# Altium PCB PCB Layout.PcbDoc (part 2 of 3)
Units mm, origin at the board's own origin, x right, y up, seen from the top; angles counter-clockwise.
Board outline 100.03 x 55.01 mm, 4 copper layers (Top Layer, Signal Layer 2, Signal Layer 1, Bottom Layer), stack 0.779 mm thick; 236 components, 218 nets, 813 pads, 395 vias.
Unrouted connection lines stored in the file: 15.
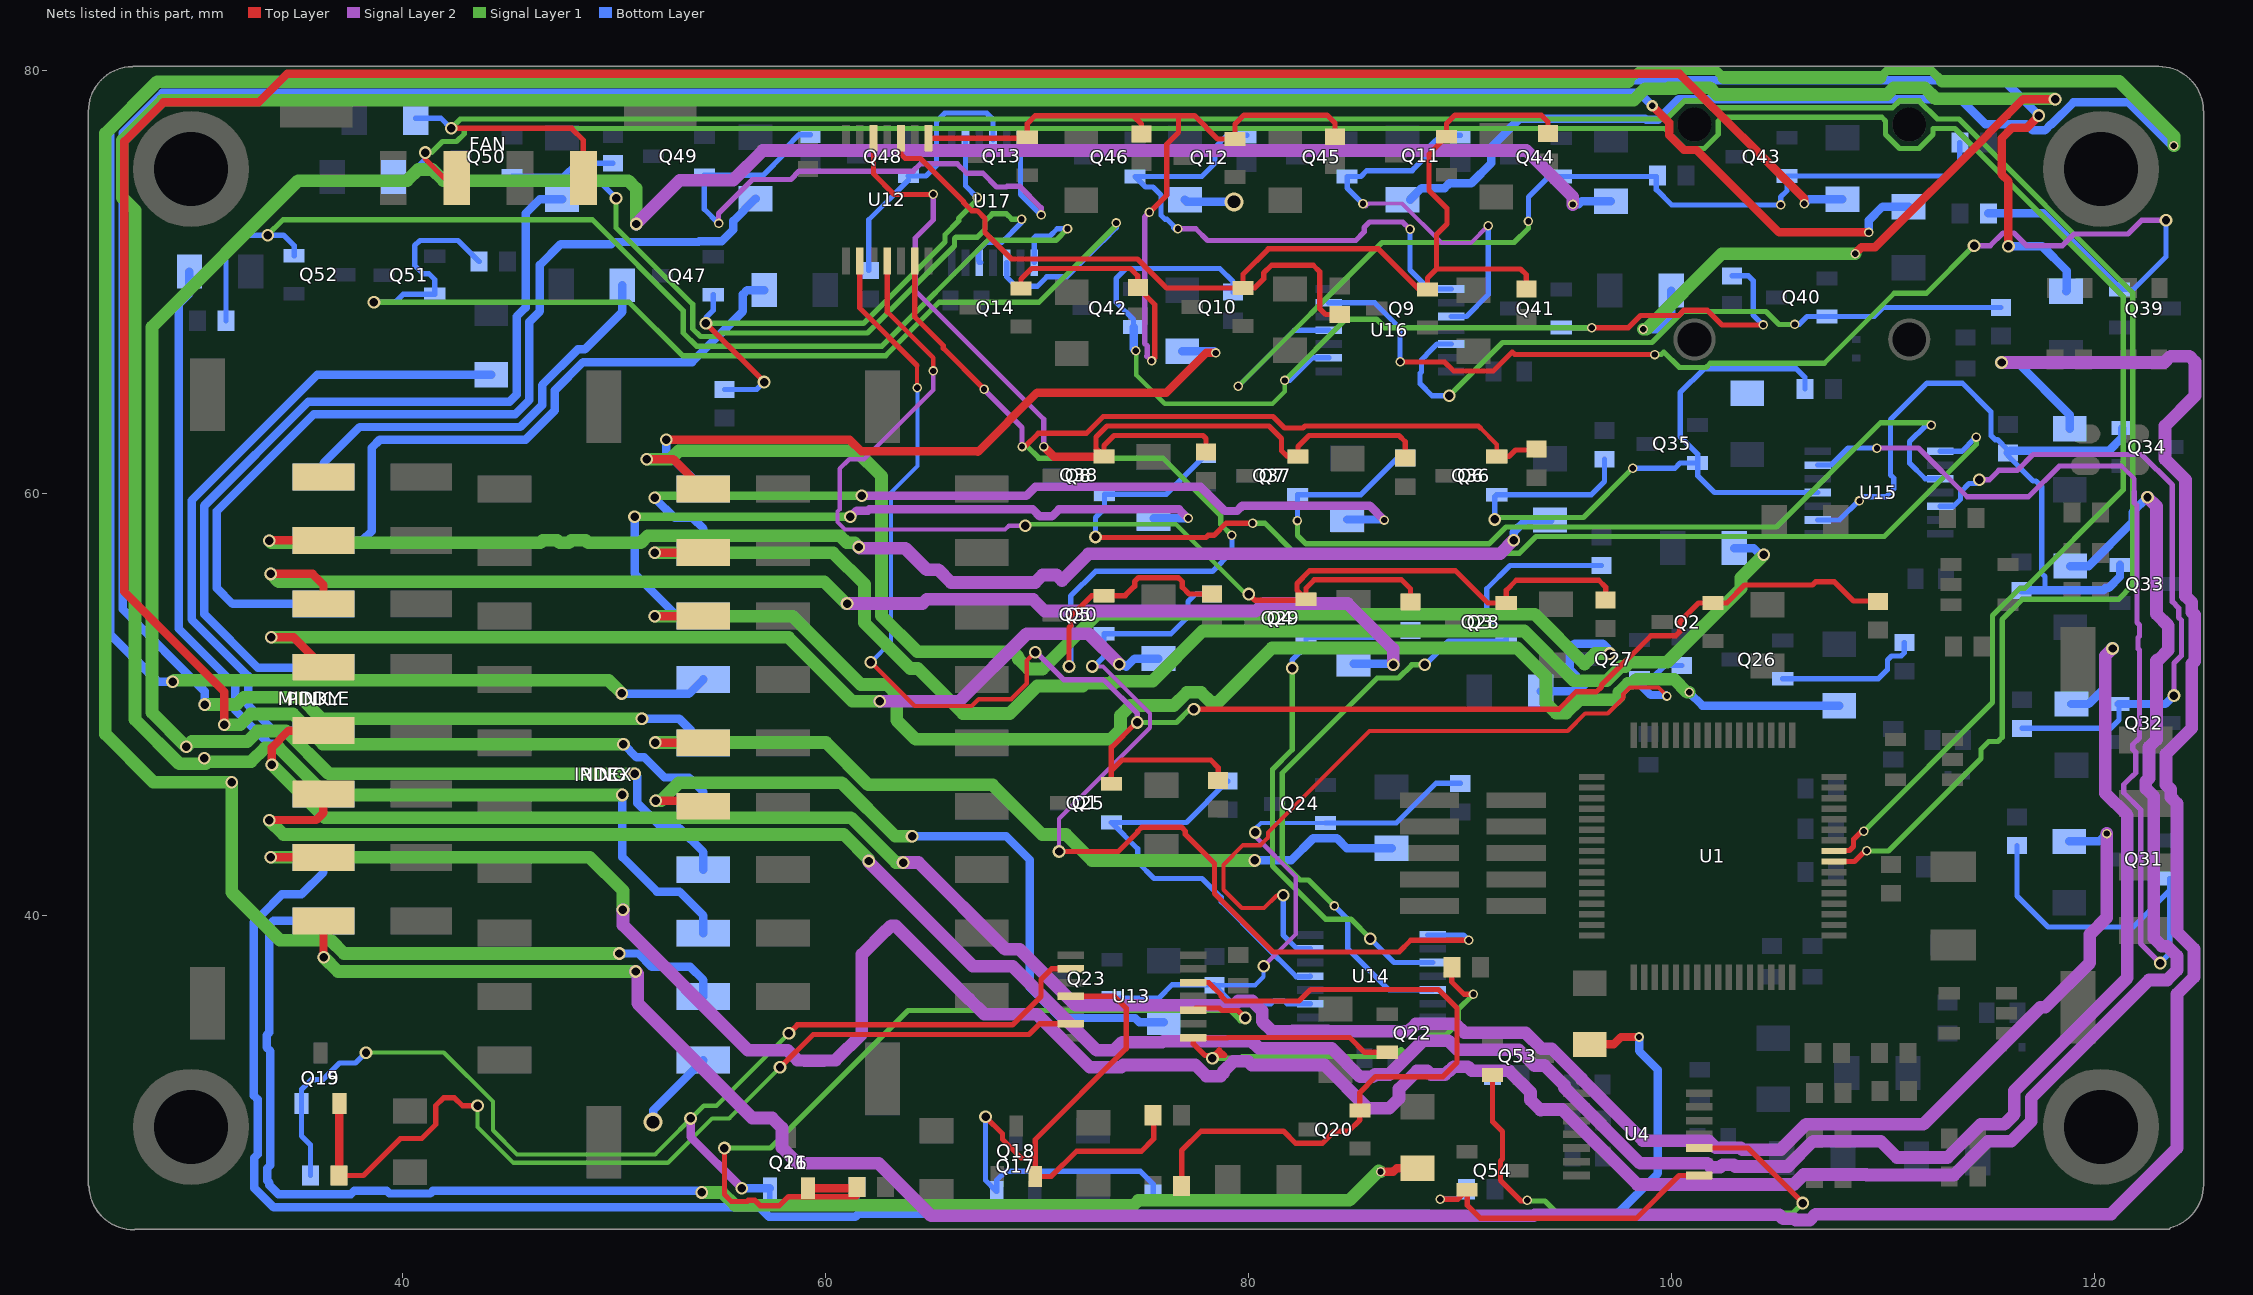
[diagram p4: the nets of this part, all layers, seen from the top]

## Via types
v1: diameter 0.6, hole 0.4, Top Layer to Bottom Layer, tented top, 220 vias
v2: diameter 0.45, hole 0.3, Top Layer to Bottom Layer, tented top, 162 vias
v3: diameter 0.9, hole 0.6, Top Layer to Bottom Layer, tented top, 9 vias
v4: diameter 0.45/0.6/0.6/0.6 (per signal layer), hole 0.3, Top Layer to Bottom Layer, tented top, 1 vias
v5: diameter 0.6/0.6/0.6/0.6 (per signal layer), hole 0.4, Top Layer to Bottom Layer, tented top, 1 vias
v6: diameter 0.6, hole 0.4, Top Layer to Bottom Layer, tented both sides, 1 vias
v7: diameter 0.54, hole 0.3, Top Layer to Bottom Layer, tented top, 1 vias

## Nets (pads, with @x,y where several pads share a name; then routed paths per layer and width w, separated by ;. In a path a pad name is that pad's centre, name@x,y a point inside that pad or via, vN(x,y) a via of type N, cw(c..) or ccw(c..) an arc to the next point about the centre after c; other vN are vias at no path point) (continued)
D2.3.E.2: D45.1 INDEX.8 | length 67.3
  Top Layer w0.4: v1(51.925,54.175) 54.205,54.175 INDEX.8@54.22,54.19
  Signal Layer 1 w0.6: v1(51.925,54.175) 58.45,54.175 61.675,50.95 62.906,50.95 63.375,50.481 63.375,49.25 64.273,48.352 73.485,48.352 73.954,48.821 73.954,49.484 74.422,49.952 76.472,49.952 77.097,50.577 77.76,50.577 78.229,50.109 78.559,50.109 81.125,52.675 92.719,52.675 94.08,51.314 94.08,50.065 94.548,49.596 95.031,49.596 95.662,50.227 97.396,50.227 97.53,50.361 97.53,50.578 97.954,51.002 98.171,51.002 98.369,51.2 100.131,51.2 100.756,50.575 v2(100.85,50.575)
  Bottom Layer w0.4: v2(100.85,50.575) 101.475,49.95 D45.1@107.95,49.95
D2.3.F.1: D42.1 INDEX.5 | length 34.9
  Top Layer w0.4: v1(51.978,45.452) 53.958,45.452 INDEX.5@54.22,45.19
  Signal Layer 1 w0.6: v1(51.978,45.452) 52.227,45.452 53.075,46.3 60.775,46.3 63.3,43.775 v1(64.1,43.775)
  Bottom Layer w0.4: v1(64.1,43.775) 68.55,43.775 69.675,42.65 69.675,36.625 71.125,35.175 74.65,35.175 74.85,34.975 D42.1@76,34.975
D2.3.F.2: D43.1 INDEX.6 | length 40
  Top Layer w0.4: v1(51.95,48.2) 54.21,48.2 INDEX.6@54.22,48.19
  Signal Layer 1 w0.6: v1(51.95,48.2) 60.025,48.2 62.025,46.2 67.9,46.2 70.25,43.85 71.381,43.85 72.606,42.625 v1(80.3,42.625)
  Bottom Layer w0.4: v1(80.3,42.625) 82.025,42.625 83.075,43.675 84.19,43.675 84.665,43.2 D43.1@86.775,43.2
D2.AB: D46.1 INDEX.9 | length 66
  Top Layer w0.4: v1(51.925,57.175) 54.205,57.175 INDEX.9@54.22,57.19
  Signal Layer 1 w0.6: v1(51.925,57.175) 60.369,57.175 61.85,55.694 61.85,53.862 64.012,51.7 64.375,51.7 66.5,49.575 68.72,49.575 70.022,50.877 72.171,50.877 72.294,51 73.65,51 73.662,51.012 73.572,51.103 75.471,51.103 77.844,53.475 93.05,53.475 95.405,51.12 96.941,51.12 97.623,51.802 97.84,51.802 98.037,52 99.806,52 103.3,55.494 103.3,55.998 v1(104.38,57.078)
  Bottom Layer w0.4: D46.1@102.975,57.4 103.9,57.4 104.222,57.078 v1(104.38,57.078)
D2.AD: D47.1 INDEX.10 | length 66.3
  Top Layer w0.4: v1(51.55,61.6) 52.81,61.6 INDEX.10@54.22,60.19
  Signal Layer 1 w0.6: v1(51.55,61.6) 52.681,61.6 53.081,62 61.45,62 62.65,60.8 62.65,54.194 64.344,52.5 68.868,52.5 69.128,52.24 69.128,52.146 69.597,51.677 70.271,51.677 72.869,54.275 93.55,54.275 95.905,51.92 96.395,52.411 v1(97.1,52.411)
  Bottom Layer w0.4: D47.1@93.825,50.625 95.8,50.625 95.698,50.727 95.905,50.935 95.905,50.955 95.2,51.659 95.2,52.641 95.434,52.875 96.766,52.875 97,52.641 97,52.307 97.1,52.407 v1(97.1,52.411)
D3.1.E: D49.1 MIDDLE.5 | length 48.4
  Top Layer w0.4: v1(33.8,53.175) 34.855,53.175 MIDDLE.5@36.265,51.765
  Signal Layer 2 w0.6: v1(62.575,50.15) 66.325,50.15 69.525,53.35 72.456,53.35 v1(73.904,51.903)
  Signal Layer 1 w0.6: v1(33.8,53.175) 58.256,53.175 61.281,50.15 v1(62.575,50.15)
  Bottom Layer w0.4: v1(73.904,51.903) 74.097,51.903 74.225,51.775 74.625,52.175 D49.1@75.75,52.175
D3.1.F: D48.1 MIDDLE.6 | length 61.2
  Top Layer w0.4: v1(33.775,56.175) 35.75,56.175 36.265,55.66 MIDDLE.6@36.265,54.765
  Signal Layer 2 w0.6: v1(61.025,54.775) 64.594,54.775 64.794,54.975 69.819,54.975 70.369,54.425 80.356,54.425 80.706,54.775 84.7,54.775 86.85,52.625 v1(86.85,51.875)
  Signal Layer 1 w0.6: v1(33.775,56.175) 34.15,55.8 59.95,55.8 60.975,54.775 v1(61.025,54.775)
  Bottom Layer w0.4: D48.1@84.975,51.925 86.8,51.925 v1(86.85,51.875)
D3.2.E: D51.1 MIDDLE.3 | length 125.3
  Top Layer w0.4: v1(33.7,44.525) 35.925,44.55 36.25,44.875 36.25,45.75 MIDDLE.3@36.265,45.765
  Signal Layer 2 w0.6: v1(62.05,42.6) 62.05,42.55 66.975,37.625 68.856,37.625 72.83,33.652 73.66,33.652 74.04,34.031 75.931,34.031 75.977,34.077 80.166,34.077 80.493,33.75 83.931,33.75 85.291,32.391 85.884,32.391 85.994,32.5 86.656,32.5 86.662,32.494 88.269,34.1 89.462,34.1 89.887,33.675 92.787,33.675 93.537,32.925 94.013,32.925 94.955,31.983 94.955,31.877 98.531,28.3 101.71,28.3 101.897,28.113 102.311,28.113 102.435,28.238 102.947,28.238 103.035,28.15 105.513,28.15 106.713,29.35 109.906,29.35 110.681,28.575 113.069,28.575 114.644,30.15 115.756,30.15 116.225,30.619 116.225,31.731 121.575,37.081 121.575,44.77 120.525,45.82 120.525,52.3 v1(120.875,52.65)
  Signal Layer 1 w0.6: v1(33.7,44.525) 34.375,43.85 60.875,43.85 62.05,42.675 v1(62.05,42.6)
  Bottom Layer w0.4: D51.1@118.925,50.025 119.75,50.025 120.475,50.75 120.475,52.25 v1(120.875,52.65)
D3.2.F: D50.1 MIDDLE.4 | length 109.9
  Top Layer w0.4: v1(33.825,47.15) 33.825,47.975 34.615,48.765 MIDDLE.4@36.265,48.765
  Signal Layer 2 w0.6: v1(63.675,42.525) 64.406,42.525 68.506,38.425 69.188,38.425 71.838,35.775 79.321,35.775 79.523,35.977 80.185,35.977 80.654,35.508 80.654,35.02 81.123,34.552 82.085,34.552 82.108,34.575 83.75,34.575 83.775,34.55 87.575,34.55 87.925,34.9 89.794,34.9 90.219,34.475 93.119,34.475 93.869,33.725 94.344,33.725 95.755,32.314 95.755,32.283 98.663,29.375 101.766,29.375 102.104,29.037 103.279,29.037 103.366,28.95 105.181,28.95 106.381,30.15 111.925,30.15 117.452,35.677 117.687,35.677 119.8,37.79 119.8,39.131 120.6,39.931 v2(120.6,43.9)
  Signal Layer 1 w0.6: v1(33.825,47.15) 36.325,44.65 61.206,44.65 63.331,42.525 v1(63.675,42.525)
  Bottom Layer w0.4: D50.1@118.825,43.525 120.225,43.525 v2(120.6,43.9)
D3.3.E.1: D54.1 MIDDLE.8
D3.3.E.2: D55.1 MIDDLE.7 | length 66.1
  Top Layer w0.4: v1(33.7,57.75) 33.715,57.765 MIDDLE.7@36.265,57.765
  Signal Layer 2 w0.6: v1(61.575,57.45) 61.631,57.394 63.775,57.394 64.794,56.375 65.344,56.375 65.944,55.775 69.919,55.775 70.269,56.125 70.931,56.125 71.187,55.869 72.444,57.125 91.9,57.125 v1(92.55,57.775)
  Signal Layer 1 w0.6: v1(33.7,57.75) 33.8,57.65 46.519,57.65 46.644,57.775 47.306,57.775 47.431,57.65 47.869,57.65 47.994,57.775 48.656,57.775 48.781,57.65 51.269,57.65 51.594,57.975 60.7,57.975 61.025,57.65 61.375,57.65 v1(61.575,57.45)
  Bottom Layer w0.4: v1(92.55,57.775) 92.55,58.15 93.125,58.725 D55.1@94.275,58.725
D3.3.F.1: D52.1 MIDDLE.2 | length 144.6
  Top Layer w0.4: v1(33.775,42.775) 36.255,42.775 MIDDLE.2@36.265,42.765
  Signal Layer 2 w0.6: v1(50.425,40.3) 50.425,39.569 56.344,33.65 57.52,33.65 57.521,33.652 58.205,33.652 58.675,33.181 59.027,33.156 59.93,33.156 60.481,33.181 61.725,34.425 61.725,38.181 62.844,39.3 62.875,39.3 63.113,39.537 63.319,39.537 66.781,36.075 66.8,36.075 67.525,35.35 70,35.35 72.498,32.852 73.991,32.852 74.09,32.95 77.499,32.95 78.022,32.427 78.685,32.427 78.829,32.57 78.829,32.658 79.298,33.127 79.985,33.127 80.162,32.95 83.6,32.95 85.65,30.9 86.656,30.9 87.125,31.369 87.125,31.825 87.975,32.675 88.469,32.675 88.644,32.5 89.306,32.5 89.481,32.675 89.519,32.675 89.719,32.875 90.381,32.875 90.581,32.675 92.337,32.675 93.35,31.662 93.35,31.294 93.819,30.825 93.828,30.825 93.854,30.851 94.849,30.851 98.4,27.3 105.794,27.3 106.269,27.775 109.219,27.775 109.244,27.75 113.375,27.75 114.975,29.35 116.088,29.35 117.025,30.287 117.025,31.4 122.6,36.975 123.456,36.975 123.925,37.444 123.925,38.106 123.456,38.575 123.209,38.575 122.825,38.959 122.825,45.653 122.45,46.028 122.45,46.364 122.6,46.514 122.6,47.988 122.95,48.338 122.95,52.069 122.984,52.103 123.037,52.103 123.506,52.571 123.506,53.725 122.95,54.281 122.95,59.375 v1(122.525,59.8)
  Signal Layer 1 w0.6: v1(33.775,42.775) 48.85,42.775 50.425,41.2 v1(50.425,40.3)
  Bottom Layer w0.4: D52.1@118.875,56.55 119.75,56.55 121.825,58.625 121.825,59.1 v1(122.525,59.8)
D3.3.F.2: D53.1 MIDDLE.1 | length 151.4
  Top Layer w0.4: MIDDLE.1@36.265,39.765 36.265,38.06 v1(36.275,38.05)
  Signal Layer 2 w0.6: v1(51.025,37.375) 51.019,37.375 51.125,37.269 51.125,35.869 56.544,30.45 57.481,30.45 57.95,29.981 57.95,29.044 58.694,28.3 62.525,28.3 65,25.825 93.5,25.825 93.55,25.875 105.1,25.875 105.3,25.675 105.844,25.675 105.894,25.625 106.556,25.625 106.831,25.9 120.796,25.9 123.925,29.029 123.925,36.312 124.725,37.112 124.725,38.438 123.925,39.238 123.925,45.319 123.625,45.619 123.625,45.984 123.414,46.196 123.4,46.209 123.4,47.656 124.625,48.881 124.625,51.922 124.756,52.053 124.756,54.243 124.625,54.374 124.625,54.825 124.325,55.125 124.325,60.634 123.35,61.609 123.35,63.179 124.775,64.604 124.775,66.207 124.503,66.478 123.619,66.478 123.316,66.175 v1(115.625,66.175)
  Signal Layer 1 w0.6: v1(36.275,38.05) 36.95,37.375 v1(51.025,37.375)
  Bottom Layer w0.4: v1(115.625,66.175) 116.375,66.175 118.85,63.7 D53.1@118.85,63.05
D4.1.E: D57.1 RING.3 | length 35.2
  Signal Layer 2 w0.4: v1(61.175,58.875) 61.475,59.175 62.015,59.175 62.065,59.225 69.81,59.225 70.135,58.9 70.715,58.9 71.04,59.225 76.732,59.225 v2(77.154,58.803)
  Signal Layer 1 w0.4: v1(50.975,58.875) v1(61.175,58.875)
  Bottom Layer w0.4: v1(50.975,58.875) 50.975,56.2 52.99,54.185 RING.3@54.23,54.185 ; D57.1@75.525,58.8 75.528,58.803 v2(77.154,58.803)
D4.1.F: D56.1 RING.2 | length 41.4
  Signal Layer 2 w0.4: v1(61.725,59.875) 69.51,59.875 69.935,60.3 77.742,60.3 78.889,59.153 79.469,59.153 79.716,59.4 85.75,59.4 v2(86.425,58.725)
  Signal Layer 1 w0.4: v1(51.925,59.775) 52.025,59.875 v1(61.725,59.875)
  Bottom Layer w0.4: v1(51.925,59.775) 52.875,58.825 53.725,58.825 54.23,58.32 RING.2@54.23,57.185 ; D56.1@84.675,58.75 86.4,58.75 v2(86.425,58.725)
D4.2.E: D59.1 RING.5 | length 142.4
  Top Layer w0.4: v7(99.1,78.325) 99.9,77.525 99.9,76.928 100.603,76.225 101.2,76.225 105.1,72.325 v2(109.35,72.325)
  Signal Layer 1 w0.6: v1(30.65,50) 32.15,50 32.5,50.35 35.15,50.35 36.175,49.325 v1(51.325,49.325)
  Bottom Layer w0.4: v1(30.65,50) 30.65,50.625 26.775,54.5 26.775,77.051 28.649,78.925 98.5,78.925 v7(99.1,78.325) ; v1(51.325,49.325) 53.09,49.325 RING.5@54.23,48.185 ; v2(109.35,72.325) 109.35,72.9 110,73.55 D59.1@111.225,73.55
D4.2.F: D58.1 RING.4 | length 158
  Top Layer w0.4: v1(115.95,71.675) 115.95,74.755 115.625,75.08 115.625,76.777 116.123,77.275 116.827,77.275 117.381,77.829 v1(117.381,77.854)
  Signal Layer 1 w0.6: v1(29.125,51.075) 29.2,51.15 49.75,51.15 v1(50.375,50.525)
  Bottom Layer w0.4: v1(29.125,51.075) 28.425,51.075 26.175,53.325 26.175,77.3 28.4,79.525 115.725,79.525 117.388,77.862 v1(117.381,77.854) ; v1(50.375,50.525) 50.4,50.5 53.545,50.5 RING.4@54.23,51.185 ; v1(115.95,71.675) 117.55,71.675 118.7,70.525 118.7,69.575 D58.1@118.675,69.55
D4.3.E.1: D62.1 RING.6 | length 140
  Top Layer w0.4: v1(31.575,49.05) 31.575,50.6 26.85,55.325 26.85,76.63 28.695,78.475 33.194,78.475 34.544,79.825 100.397,79.825 106.3,73.922 v2(106.3,73.675)
  Signal Layer 1 w0.6: v1(31.575,49.05) 32.331,49.05 32.831,49.55 34.819,49.55 36.244,48.125 v1(50.45,48.125)
  Bottom Layer w0.4: v1(50.45,48.125) 51.075,47.5 51.44,47.5 52.39,46.55 53.55,46.55 54.23,45.87 RING.6@54.23,45.185 ; v2(106.3,73.675) 106.525,73.9 D62.1@108.1,73.9
D4.3.E.2: D63.1 RING.7 | length 126.1
  Signal Layer 2 w0.6: v1(51.05,72.725) 53.125,74.8 55.641,74.8 57.041,76.2 93.15,76.2 95.35,74 v2(95.35,73.65)
  Signal Layer 1 w0.6: v1(50.975,46.725) 36.513,46.725 34.488,48.75 33.162,48.75 32.662,48.25 31.244,48.25 31.241,48.252 30.027,48.252 v1(29.775,48) 28.15,49.625 28.15,67.856 35.069,74.775 40.219,74.775 40.744,75.3 41.406,75.3 41.931,74.775 50.675,74.775 51.05,74.4 v1(51.05,72.725)
  Bottom Layer w0.4: v1(50.975,46.725) 51.1,46.6 51.1,45.34 52.29,44.15 53.1,44.15 54.23,43.02 RING.7@54.23,42.185 ; v2(95.35,73.65) 95.625,73.65 95.775,73.8 D63.1@97.15,73.8
D4.3.F.1: D60.1 RING.8 | length 181.9
  Top Layer w0.4: v2(108.7,71.325) 109,71.625 109.64,71.625 115.025,77.01 115.025,77.026 115.874,77.875 115.89,77.875 116.644,78.629 v1(118.156,78.629)
  Signal Layer 1 w0.6: v1(50.4,45.725) 36.381,45.725 34.156,47.95 33.494,47.95 32.844,47.3 30.779,47.3 v1(30.626,47.452) 30.626,47.274 30.7,47.2 29.444,47.2 27.35,49.294 27.35,73.379 26.75,73.979 26.75,76.671 28.654,78.575 98.219,78.575 98.769,79.125 100.175,79.125 ; v2(98.675,67.75) 98.827,67.75 102.402,71.325 v2(108.7,71.325) ; 99.878,79.175 101.825,79.175 102.15,78.85 110.21,78.85 110.535,79.175 111.985,79.175 112.51,78.65 117.046,78.65 117.049,78.654 118.131,78.654 v1(118.156,78.629)
  Bottom Layer w0.4: v1(50.4,45.725) 50.4,42.785 52.035,41.15 53.1,41.15 54.23,40.02 RING.8@54.23,39.185 ; v2(98.675,67.75) 99.325,67.75 100,68.425 D60.1@100,69.575
D4.3.F.2: D61.1 RING.1 | length 32.8
  Top Layer w0.4: v1(52.475,62.525) 61.149,62.525 61.704,61.97 67.192,61.97 67.212,61.95 70.012,64.75 76.125,64.75 78.003,66.628 v2(78.454,66.628)
  Bottom Layer w0.4: v1(52.475,62.525) 52.475,61.96 52.465,61.95 RING.1@54.23,60.185 ; D61.1@76.875,66.7 78.382,66.7 v2(78.454,66.628)
D4.AB: D64.1 RING.9 | length 207
  Signal Layer 1 w0.4: 97.962,79.45 98.487,79.975 102.156,79.975 102.481,79.65 ; 109.879,79.65 110.204,79.975 112.316,79.975 112.816,79.475
  Signal Layer 1 w0.6: v1(50.25,38.225) 37.231,38.225 36.606,38.85 34.2,38.85 31.925,41.125 v1(31.925,46.325) 28.225,46.325 25.95,48.6 25.95,77.003 28.397,79.45 97.962,79.45 ; 102.481,79.65 109.879,79.65 ; 112.816,79.475 121.175,79.475 123.775,76.875 v2(123.775,76.425)
  Bottom Layer w0.4: v1(50.25,38.225) 51.165,38.225 51.79,37.6 53.6,37.6 54.23,36.97 RING.9@54.23,36.185 ; D64.1@87.65,73.875 88.2,74.425 89.286,74.425 89.514,74.654 90.544,74.654 91.5,75.609 91.5,76.366 92.834,77.7 98.777,77.7 98.822,77.655 99.378,77.655 100.348,78.625 113.675,78.625 114.85,77.45 116.795,77.45 117.091,77.154 117.671,77.154 117.967,77.45 117.995,77.45 119.02,78.475 121.63,78.475 123.68,76.425 v2(123.775,76.425)
D4.AD: D65.1 RING.10 | length 6.3
  Bottom Layer w0.4: v3(51.85,30.25) 51.85,30.805 RING.10@54.23,33.185 ; D65.1@77,73.875 77.1,73.775 v3(79.325,73.775)
D5.1.E: D67.1 PINKY.2 | length 29.1
  Bottom Layer w0.4: PINKY.2@36.265,57.76 36.275,57.75 38.1,57.75 38.55,58.2 38.55,62.15 38.925,62.525 44.869,62.525 45.821,62.525 47.2,63.904 47.2,64.856 48.539,66.195 53.695,66.195 56.1,68.6 56.1,69.4 56.3,69.6 D67.1@57.1,69.6
D5.1.F: D66.1 PINKY.1 | length 19.6
  Bottom Layer w0.4: PINKY.1@36.265,60.76 36.265,61.415 37.975,63.125 45.572,63.125 46.6,64.153 46.6,65.104 48.291,66.795 48.62,66.795 50.4,68.575 D66.1@50.4,69.825
D5.2.E: D69.1 PINKY.4 | length 39.5
  Bottom Layer w0.4: PINKY.4@36.265,51.76 36.255,51.75 33.15,51.75 30.625,54.275 30.625,59.401 35.549,64.325 45.075,64.325 45.4,64.65 45.4,68.35 45.825,68.775 45.825,73.225 46.5,73.9 D69.1@47.55,73.9
D5.2.F: D68.1 PINKY.3 | length 44.3
  Bottom Layer w0.4: PINKY.3@36.265,54.76 31.965,54.76 31.225,55.5 31.225,59.153 35.797,63.725 45.324,63.725 46,64.401 46,68.101 46.5,68.601 46.5,70.791 47.484,71.775 49.875,71.775 49.975,71.875 54.009,71.875 54.034,71.9 55.09,71.9 55.65,72.46 55.65,72.875 D68.1@56.7,73.925
D5.3.E: D71.1 PINKY.6 | length 27.9
  Bottom Layer w0.4: D71.1@29.925,70.475 29.925,69.45 29.425,68.95 29.425,53.575 32.1,50.9 32.1,49.726 33.676,48.15 33.855,48.15 36.255,45.75 PINKY.6@36.265,45.76
D5.3.F: D70.1 PINKY.5 | length 31.5
  Bottom Layer w0.4: PINKY.5@36.265,48.76 36.255,48.75 33.925,48.75 32.7,49.975 32.7,51.351 30.025,54.026 30.025,59.65 35.975,65.6 D70.1@44.2,65.6
D5.AB: D72.1 PINKY.7 | length 94.8
  Top Layer w0.4: D72.1@96.15,33.925 97.275,33.925 97.627,34.277 v2(98.48,34.277)
  Bottom Layer w0.4: PINKY.7@36.265,42.76 36.265,42.065 35.225,41.025 34.3,41.025 33.325,40.05 33.325,40.049 32.975,39.699 32.975,31.505 33.15,31.33 33.15,28.72 33,28.57 33,27.126 33.901,26.225 56.884,26.225 57.334,25.775 61.417,25.775 61.567,25.925 88.535,25.925 88.61,25.85 97.4,25.85 99.375,27.825 99.375,32.725 98.48,33.62 v2(98.48,34.277)
D5.AD: D73.1 PINKY.8 | length 70.9
  Top Layer w0.4: v2(86.254,27.901) 86.851,27.901 87.025,28.075 D73.1@88,28.075
  Signal Layer 1 w0.6: v1(54.15,26.925) 55.119,26.925 55.719,26.325 74.531,26.325 74.556,26.3 74.806,26.55 84.775,26.55 86.176,27.951 86.226,27.901 v2(86.254,27.901)
  Bottom Layer w0.4: PINKY.8@36.265,39.76 36.25,39.775 33.9,39.775 33.7,39.575 33.7,34.49 33.575,34.365 33.575,33.785 33.75,33.61 33.75,28.215 33.6,28.065 33.6,27.485 33.7,27.385 33.7,27.275 34.125,26.85 37.566,26.85 37.716,27 39.259,27 39.384,26.875 41.316,26.875 41.441,27 54.075,27 v1(54.15,26.925)
FAN_1: D7.1 FAN.1 U1.8 | length 131.1
  Top Layer w0.25: v1(42.3,77.25) 48,77.25 48.55,76.7 48.55,74.92 FAN.1@48.565,74.905 ; U1.8@107.7,42.575 108.669,42.575 109.172,43.077 v2(109.255,43.077)
  Signal Layer 1 w0.25: v1(42.3,77.25) 42.739,77.689 99.773,77.689 100.634,78.55 101.566,78.55 101.891,78.225 110.469,78.225 110.794,78.55 111.726,78.55 112.587,77.689 113.613,77.689 121.825,69.476 121.825,55.647 121.153,54.975 116.605,54.975 115.65,54.02 115.65,48.45 115.45,48.25 115.016,48.25 114.65,47.884 114.65,47.45 110.277,43.077 v2(109.255,43.077)
  Bottom Layer w0.25: D7.1@40.625,77.725 41.825,77.725 v1(42.3,77.25)
FAN_2: D8.1 FAN.3 U1.9 | length 123.9
  Top Layer w0.25: v1(41.077,76.104) 41.077,75.798 41.97,74.905 FAN.3@42.565,74.905 ; U1.9@107.7,43.075 107.725,43.1 108.435,43.1 108.625,43.29 108.625,43.625 109,44 v2(109.109,44)
  Signal Layer 1 w0.25: v1(41.077,76.104) 41.379,76.104 41.9,76.625 42.559,76.625 42.925,76.991 42.925,77.239 99.695,77.239 100.634,76.3 101.566,76.3 102.225,76.959 102.225,77.595 102.405,77.775 109.955,77.775 110.135,77.595 110.135,76.959 110.794,76.3 111.726,76.3 112.385,76.959 112.385,77.239 113.426,77.239 121.375,69.29 121.375,60.146 116.729,55.5 116.493,55.5 115.2,54.207 115.2,50.091 v2(109.109,44)
  Bottom Layer w0.25: D8.1@39.575,74.95 40.225,74.95 41.077,75.802 v1(41.077,76.104)
G1.1.E.1: Q3.2 Q4.2 R14.2 R15.2 U12.4 | length 63.8
  Top Layer w0.2: 62.925,68.575 65.1,66.4 v2(65.1,65.775)
  Top Layer w0.25: 62.925,68.575 U12.4@62.925,70.975 ; v1(80.025,55.225) 80.325,54.925 82.675,54.925 Q4.2@82.725,54.975 ; R15.2@87.675,54.85 87.675,55.475 87.25,55.9 83.125,55.9 82.725,55.5 Q4.2@82.725,54.975 ; R14.2@96.9,54.95 96.9,55.55 96.575,55.875 92.675,55.875 92.2,55.4 Q3.2@92.2,54.8 91.325,54.8 89.8,56.325 82.9,56.325 82.3,55.725 82.3,55.4 Q4.2@82.725,54.975
  Signal Layer 2 w0.2: v2(65.1,65.775) 65.1,64.876 61.824,61.6 61.126,61.6 60.675,61.149 60.675,59.224 60.575,59.124 60.575,58.626 60.926,58.275 68.5,58.275 68.675,58.45 v1(69.45,58.45)
  Signal Layer 1 w0.2: v1(69.45,58.45) 69.525,58.525 76.583,58.525 79.883,55.225 v1(80.025,55.225)
G1.1.F.1: Q1.2 Q2.2 R66.2 R67.2 U12.2 | length 85.6
  Top Layer w0.2: v1(62.15,52) 64.225,49.925 66.925,49.925 67.255,50.255 68.789,50.255 69.525,50.991 69.525,52.074 v1(69.928,52.478) ; 64.338,66.037 64.338,64.988 v2(64.35,64.975)
  Top Layer w0.25: U12.2@61.625,70.975 61.625,68.75 64.338,66.037 ; Q1.2@73.525,46.25 73.525,46.875 ; v1(74.754,49.152) 74.702,49.152 73.525,47.975 73.525,46.875 ; v1(77.429,49.777) 78.41,49.777 94.682,49.777 95.507,50.602 96.47,50.602 96.705,50.837 96.705,50.919 99.035,53.25 100.21,53.25 100.4,53.44 100.4,53.9 101.3,54.8 Q2.2@101.975,54.8 102.625,54.8 103.475,55.65 105.485,55.65 106.684,55.65 106.834,55.8 107.725,55.8 108.625,54.9 109.75,54.9 R67.2@109.775,54.875 ; R66.2@78.575,46.4 78.575,47.025 78.225,47.375 74.025,47.375 73.525,46.875
  Signal Layer 2 w0.25: v1(69.928,52.478) 69.964,52.478 71.266,51.175 73.125,51.175 ; 73.2,51.125 74.754,49.571 v1(74.754,49.152)
  Signal Layer 1 w0.25: v1(74.754,49.152) 76.602,49.152 77.227,49.777 v1(77.429,49.777)
  Bottom Layer w0.2: v1(62.15,52) 63.1,52.95 63.1,60.032 64.35,61.282 v2(64.35,64.975)
G1.2.E.1: Q7.2 Q8.2 R18.2 R19.2 U12.12 | length 47.4
  Top Layer w0.25: U12.12@62.275,76.775 62.275,75.1 63.25,74.125 v2(65.1,74.125) ; R18.2@78,61.95 78,62.575 77.85,62.725 73.65,62.725 73.175,62.25 Q8.2@73.175,61.725 72.8,62.1 72.8,62.65 73.325,63.175 80.975,63.175 81.575,62.575 81.575,62 81.85,61.725 Q7.2@82.35,61.725 82.35,62.2 82.875,62.725 87.125,62.725 87.425,62.425 R19.2@87.425,61.65
  Top Layer w0.4: v2(70.325,62.2) 70.8,61.725 Q8.2@73.175,61.725
  Signal Layer 2 w0.25: v2(65.1,74.125) 65.1,72.911 64.25,72.061 64.25,69.566 70.325,63.491 v2(70.325,62.2)
G1.2.F.1: Q5.2 Q6.2 R16.2 R17.2 U12.6 | length 72.1
  Top Layer w0.2: 90.975,63.075 91.75,62.3 Q6.2@91.75,61.725
  Top Layer w0.25: U12.6@64.225,70.975 64.225,68.325 65.572,66.978 65.572,66.853 67.45,64.975 v2@67.575,64.975 ; v2(69.3,62.2) 69.441,62.2 70.066,62.825 72.339,62.825 73.139,63.625 81.161,63.625 81.711,63.075 82.589,63.075 82.689,63.175 90.875,63.175 90.975,63.075 ; v1(71.525,51.8) 71.525,53.64 71.6,53.715 71.6,54.15 72.6,55.15 Q5.2@73.175,55.15 74.177,55.15 74.625,55.598 74.625,55.81 74.815,56 76.685,56 76.875,55.81 76.875,55.55 77.2,55.225 R16.2@78.275,55.225 R16.2@78.3,55.25 ; Q6.2@91.75,61.725 92.325,61.725 92.637,62.037 93.587,62.037 R17.2@93.625,62.075
  Signal Layer 2 w0.25: v2(67.503,64.903) 69.3,63.106 v2(69.3,62.2)
  Signal Layer 1 w0.25: v2(69.3,62.2) 69.547,62.2 70.097,61.65 75.953,61.65 78.7,58.903 78.7,58.525 v2(79.225,58)
  Bottom Layer w0.25: v1(71.525,51.8) 71.6,51.875 71.6,55.125 72.775,56.3 78.3,56.3 79.225,57.225 v2(79.225,58)
G1.3.E.1: Q12.2 Q13.2 Q14.2 R23.2 R24.2 R25.2 U12.8 | length 46.4
  Top Layer w0.25: U12.8@64.875,76.775 69.5,76.775 Q13.2@69.55,76.825 69.55,77.475 69.925,77.85 74.55,77.85 ; Q14.2@69.25,69.675 69.25,70.125 69.75,70.625 74.425,70.625 74.775,70.275 R23.2@74.775,69.725 74.775,69.71 75.575,68.91 75.575,66.4 v2(75.425,66.25) ; R24.2@74.95,76.975 74.95,77.45 74.55,77.85 ; v2(75.325,73.275) 76.15,74.1 76.15,76.5 76.7,77.05 76.7,77.85 ; R25.2@84.1,76.85 84.1,77.5 83.725,77.875 79.8,77.875 79.375,77.45 Q12.2@79.375,76.75 78.55,76.75 77.45,77.85 76.7,77.85 ; 74.55,77.85 76.7,77.85
  Signal Layer 2 w0.25: v2(75.325,73.275) 75.1,73.05 75.1,67.078 75.225,66.953 75.225,66.497 75.204,66.476 75.204,66.471 v2(75.425,66.25)
G1.3.F.1: Q9.2 Q10.2 Q11.2 R20.2 R21.2 R22.2 U12.10 | length 57.4
  Top Layer w0.25: U12.10@63.575,76.775 63.575,76.02 63.775,75.82 64.496,75.82 66.55,73.766 66.55,73.723 66.919,73.354 67.187,73.354 67.553,72.987 67.553,72.32 68.798,71.075 74.76,71.075 76.135,69.7 Q10.2@79.75,69.7 ; R21.2@84.325,68.45 83.65,68.45 83.375,68.725 83.375,70.475 83.075,70.775 81.1,70.775 80.725,70.4 80.725,70.125 80.3,69.7 Q10.2@79.75,69.7 ; R22.2@93.15,69.65 93.15,70.325 92.875,70.6 88.9,70.6 ; R20.2@94.175,77 94.175,77.55 93.85,77.875 89.775,77.875 89.375,77.475 Q11.2@89.375,76.85 88.55,76.025 88.55,74.317 89.4,73.467 89.4,72.722 88.9,72.222 88.9,70.6 ; Q10.2@79.75,69.7 79.75,70.35 80.95,71.55 86.15,71.55 88.075,69.625 Q9.2@88.475,69.625 88.475,70.175 88.9,70.6
G1.AB.1: Q15.2 Q16.2 R26.2 R27.2 U13.2 | length 59.4
  Top Layer w0.25: v1@58.275,34.45 58.675,34.85 68.85,34.85 70.2,36.2 70.2,37 70.7,37.5 U13.2@71.6,37.5
  Signal Layer 2 w0.4: v1(53.625,30.425) 53.625,29.55 v1(56.05,27.125)
  Signal Layer 1 w0.2: v1(38.275,33.525) 38.275,33.55 41.95,33.55 44.275,31.225 44.275,29.866 45.416,28.725 51.95,28.725 54.25,31.025 54.85,31.025 v1(58.278,34.452)
  Bottom Layer w0.25: R26.2@35.65,27.725 35.65,29.175 35.225,29.6 Q15.2@35.225,31.125 35.225,31.8 35.675,32.25 36.225,32.25 37.025,33.05 37.775,33.05 38.25,33.525 v1(38.275,33.525) ; Q16.2@57.375,27.125 57.375,26.55 57.625,26.3 61.2,26.3 61.5,26.6 R27.2@61.5,27.175
  Bottom Layer w0.4: v1(56.05,27.125) Q16.2@57.375,27.125
G1.AD.1: Q17.2 Q18.2 R28.2 R29.2 U13.4 | length 36
  Top Layer w0.25: v1(67.575,30.5) 68.375,29.7 68.375,29.44 69.265,28.55 69.925,28.55 ; U13.4@71.6,36.2 73.675,36.2 74.225,35.65 74.225,33.725 69.925,29.425 69.925,28.55 ; R29.2@75.5,30.575 75.525,30.55 75.525,29.45 74.95,28.875 71.875,28.875 70.675,27.675 Q18.2@69.925,27.675 69.925,28.55
  Bottom Layer w0.25: v1(67.575,30.5) 67.575,27.5 Q17.2@68.1,26.975 68.1,27.5 68.525,27.925 74.9,27.925 75.5,27.325 R28.2@75.5,26.825
G2.1.AD: Q28.2 R39.2 U14.12 | length 36.6
  Signal Layer 1 w0.25: v2(84.075,40.475) 82.85,41.7 82.445,41.7 81.6,42.545 81.6,46.75 86.1,51.25 87.109,51.25 87.734,51.875 v1(88.35,51.875)
  Bottom Layer w0.25: v2(84.075,40.475) 84.7,39.85 84.7,38.464 86.664,36.5 U14.12@88.725,36.5 ; v1(88.35,51.875) 89.475,53 Q28.2@92.2,53 92.2,53.275 91.275,54.2 91.275,55.475 92.375,56.575 R39.2@96.7,56.575
G2.1.E: Q20.2 R31.2 U13.12 | length 33.7
  Top Layer w0.25: R31.2@76.85,27.225 76.85,28.9 77.775,29.825 81.665,29.825 82.24,29.25 83.51,29.25 84.085,29.825 84.75,29.825 85.275,30.35 Q20.2@85.275,30.8 85.275,31.65 86.025,32.4 89.2,32.4 89.875,33.075 89.875,35.65 89,36.525 82.95,36.525 82.4,35.975 81.715,35.975 81.713,35.977 81.195,35.977 81.193,35.975 78.94,35.975 78.725,36.19 78.725,36.25 78.125,36.85 U13.12@77.4,36.85
G2.1.F: Q19.2 R30.2 U13.6 | length 44.6
  Top Layer w0.25: R30.2@37,27.725 38.15,27.725 39.9,29.475 40.91,29.475 41.575,30.14 41.575,31.034 41.941,31.4 42.459,31.4 42.834,31.025 v1(43.55,31.025) ; v1(57.853,32.852) 57.877,32.852 59.425,34.4 69.625,34.4 70.125,34.9 U13.6@71.6,34.9
  Top Layer w0.4: R30.2@37,27.725 Q19.2@37,31.1
  Signal Layer 1 w0.2: v1(43.55,31.025) 43.55,30.025 45.25,28.325 52.545,28.325 54.645,30.425 55.45,30.425 57.853,32.828 v1(57.853,32.852)
G2.2.E: Q22.2 R33.2 U13.8 | length 28.7
  Top Layer w0.25: v1(78.304,33.277) 78.304,33.346 78.629,33.671 78.9,33.4 77.95,33.4 77.4,33.95 U13.8@77.4,34.25 77.425,34.225 79.009,34.225 79.034,34.25 84.8,34.25 85.5,33.55 Q22.2@86.575,33.55 ; R33.2@89.625,37.575 89.625,36.875 90.2,36.3 v2(90.65,36.3)
  Signal Layer 1 w0.25: v1(78.304,33.277) 79.543,33.277 79.593,33.227 79.716,33.35 86.901,33.35 87.228,33.677 87.53,33.375 88.53,34.375 89.35,34.375 89.958,34.983 89.925,35.016 89.925,35.575 v2(90.65,36.3)
G2.2.F: Q21.2 R32.2 U13.10 | length 41.7
  Top Layer w0.25: v1(55.225,29.025) 55.225,26.825 55.55,26.5 56.309,26.5 56.359,26.55 56.665,26.55 56.915,26.3 57.835,26.3 58.26,26.725 61.5,26.725 R32.2@61.5,27.175 ; U13.10@77.4,35.55 77.5,35.65 78.629,35.65 78.754,35.525 79.506,35.525 v1(79.854,35.177)
  Top Layer w0.4: Q21.2@59.175,27.125 61.45,27.125 R32.2@61.5,27.175
  Signal Layer 1 w0.25: v1(55.225,29.025) 57.409,29.025 63.909,35.525 79.15,35.525 v1@79.625,35.05
G2.3.E.1: Q25.2 Q26.2 R36.2 R37.2 U14.4 | length 26.2
  Bottom Layer w0.25: 78.684,40.9 77.809,41.775 75.54,41.775 74.775,42.54 74.775,43.175 Q25.2@73.525,44.425 77.075,44.425 R36.2@79.025,46.375 ; 78.725,40.9 78.725,40.675 80.675,38.725 82.275,37.125 82.9,37.125 U14.4@82.925,37.15 ; Q26.2@105.275,51.225 109.8,51.225 110.225,51.65 110.225,52.11 110.415,52.3 110.875,52.3 111.025,52.45 R37.2@111.025,52.925
G2.3.F.1: Q23.2 Q24.2 R34.2 R35.2 U14.2 | length 31.6
  Signal Layer 2 w0.2: v1(80.329,43.952) 80.329,43.771 82.25,41.85 82.25,39.15 v1(80.725,37.625)
  Bottom Layer w0.2: R34.2@78.4,36.725 80.325,36.725 80.725,37.125 v1(80.725,37.625) ; v1(80.329,43.952) 80.329,44.129 80.6,44.4 Q24.2@83.65,44.4
  Bottom Layer w0.25: Q23.2@73.55,36.125 75.775,36.125 76.4,36.75 78.375,36.75 R34.2@78.4,36.725 79.275,35.85 81.068,35.85 81.195,35.977 81.713,35.977 81.84,35.85 U14.2@82.925,35.85 ; Q24.2@83.65,44.4 87,44.4 88.875,46.275 R35.2@90.025,46.275
G2.AB: Q27.2 R38.2 U14.6 | length 37
  Top Layer w0.2: v1(81.65,40.975) 81.349,40.975 80.749,40.375 79.692,40.375 78.825,41.242 78.825,42.425 79.75,43.35 80.575,43.35 80.929,43.704 80.929,43.952 85.729,48.752 95.106,48.752 95.931,49.577 97.002,49.577 97.73,50.305 97.73,50.495 98.037,50.802 99.398,50.802 v2(99.8,50.4)
  Bottom Layer w0.25: v1(81.65,40.975) 81.65,39.105 82.305,38.45 U14.6@82.925,38.45 ; Q27.2@98.5,51.25 99.1,51.25 99.7,51.85 R38.2@100.5,51.85
  Bottom Layer w0.4: Q27.2@98.5,51.25 98.5,50.975 99.025,50.45 99.75,50.45 v2(99.8,50.4)
G3.1.E: Q30.2 R41.2 U14.8 | length 45.6
  Top Layer w0.25: v1(71.05,43.05) 73.85,43.05 74.775,43.975 74.775,44.01 74.965,44.2 76.835,44.2 77.025,44.01 77.025,43.85 78.4,42.475 78.4,41.066 81.166,38.3 87.134,38.3 87.684,38.85 v2(90.425,38.85)
  Signal Layer 2 w0.2: v1(71.05,43.05) 71.05,44.6 75.354,48.904 75.354,49.572 73.126,51.8 v1(72.625,51.8)
  Bottom Layer w0.25: v1(72.625,51.8) 72.7,51.8 73.175,52.275 Q30.2@73.175,53.35 76.35,53.35 77.15,54.15 77.15,54.875 77.5,55.225 R41.2@78.275,55.225 ; U14.8@88.475,39.1 U14.8@88.725,39.1 90.175,39.1 v2(90.425,38.85)
G3.1.F: Q29.2 R40.2 U14.10 | length 26
  Signal Layer 1 w0.25: v1(82.075,51.725) 82.075,47.861 81.15,46.936 81.15,42.359 83.659,39.85 84.85,39.85 v1(85.775,38.925)
  Bottom Layer w0.25: v1(82.075,51.725) 82.075,52.1 82.725,52.75 Q29.2@82.725,53.175 86.225,53.175 86.55,53.5 R40.2@87.675,53.5 ; v1(85.775,38.925) 86.9,37.8 U14.10@88.725,37.8
G3.2.E: Q32.2 R47.2 U15.12 | length 31.4
  Signal Layer 2 w0.25: v1(114.575,60.625) 115.044,60.625 115.497,61.078 116.369,61.078 117.116,61.825 122.25,61.825 123.7,60.375 123.7,54.866 124,54.566 124,54.115 124.131,53.984 124.131,52.312 123.775,51.956 v1(123.775,50.425)
  Bottom Layer w0.25: U15.12@112.725,59.375 113.345,59.375 113.68,59.71 113.68,60.041 114.089,60.45 114.42,60.45 v1@114.585,60.615 ; v1(114.575,60.625) v1@114.575,60.722 ; R47.2@116.6,48.875 120.775,48.875 121.175,49.275 Q32.2@121.175,50.025
  Bottom Layer w0.4: Q32.2@121.175,50.025 123.375,50.025 v1(123.775,50.425)
G3.2.F: Q31.2 R46.2 U15.6 | length 56.5
  Signal Layer 2 w0.2: 121.3,61.282 121.9,60.682 121.9,60.059
  Signal Layer 2 w0.25: v2(109.73,62.128) 111.697,62.128 114,59.825 115.325,59.825 115.328,59.828 116.903,59.828 118.357,61.282 121.3,61.282 ; 121.9,60.059 121.9,59.541 122.025,59.416 122.025,53.884 122.15,53.759 122.15,53.23 122.081,53.161 122.081,52.644 122.15,52.575 122.15,48.422 121.825,48.097 121.825,47.89 121.975,47.74 121.975,46.772 121.834,46.631 121.815,46.631 121.4,46.216 121.4,45.828 122.2,45.028 122.2,38.7 v1(123.125,37.775)
  Bottom Layer w0.25: U15.6@106.925,61.325 107.564,61.325 108.367,62.128 v2(109.73,62.128) ; R46.2@116.35,43.325 116.35,40.95 117.825,39.475 121.85,39.475 123.575,41.2 ; v1(123.125,37.775) 123.575,38.225 123.575,41.2 ; Q31.2@123.575,41.775 123.575,41.2
G3.3.E.1: Q35.2 Q36.2 R44.2 R45.2 U15.4 | length 35.7
  Signal Layer 1 w0.25: v1(91.654,58.753) 91.752,58.85 95.85,58.85 v2(98.175,61.175)
  Bottom Layer w0.25: v1(91.654,58.753) 91.654,59.829 Q36.2@91.75,59.925 96.225,59.925 96.85,60.55 R45.2@96.85,61.6 ; v2(98.175,61.175) 100.175,61.175 100.425,61.425 Q35.2@101.25,61.425 ; R44.2@106.325,64.925 106.325,65.475 105.925,65.875 101.55,65.875 100.425,64.75 100.425,62.675 101.25,61.85 Q35.2@101.25,61.425 ; U15.4@106.925,60.025 102.05,60.025 101.25,60.825 Q35.2@101.25,61.425
G3.3.F.2: Q33.2 Q34.2 R42.2 R43.2 U15.2 | length 34.9
  Bottom Layer w0.25: U15.2@106.925,58.725 107.95,58.725 108.905,59.68 v2(108.905,59.628) 109.102,59.825 110.159,59.825 110.525,60.191 110.525,60.709 110.375,60.859 110.375,63.482 112.093,65.2 113.768,65.2 115.125,63.843 115.125,62.715 115.315,62.525 115.425,62.525 115.925,62.025 R43.2@115.925,61.9 115.925,61.766 117.116,60.575 117.25,60.575 117.525,60.3 117.525,56.2 117.675,56.05 117.675,55.4
  Bottom Layer w0.4: R43.2@115.925,61.9 116.025,62 120.7,62 121.325,62.625 Q34.2@121.325,63.075 ; R42.2@116.575,55.4 117.675,55.4 120.434,55.4 120.559,55.525 120.7,55.525 121.225,56.05 Q33.2@121.225,56.6
G4.1.E: Q38.2 R49.2 U15.8 | length 54.9
  Top Layer w0.25: v1@72.775,57.9 77.991,57.9 78.091,58 78.375,58 78.95,58.575 v2(80.2,58.575)
  Signal Layer 1 w0.25: v2(80.2,58.575) 80.791,58.575 82.216,57.15 92.809,57.15 93.609,57.95 110.075,57.95 114.425,62.3 v2(114.425,62.65)
  Bottom Layer w0.25: v1(72.775,57.925) 72.775,58.85 73.2,59.275 Q38.2@73.2,59.95 76.125,59.95 R49.2@78,61.825 ; U15.8@112.725,61.975 113.75,61.975 114.353,62.578 114.425,62.506 v2(114.425,62.65)
G4.1.F: Q37.2 R48.2 U15.10 | length 44.5
  Signal Layer 2 w0.25: v2(112.305,63.203) v2@112.377,63.275
  Signal Layer 1 w0.25: v2(82.325,58.7) 82.325,58 82.725,57.6 91.385,57.6 92.185,58.4 104.975,58.4 109.9,63.325 112.184,63.325 v2(112.305,63.203)
  Bottom Layer w0.25: v2(82.325,58.7) Q37.2@82.325,59.925 85.325,59.925 87.05,61.65 R48.2@87.425,61.65 ; v2@112.305,63.18 112.024,63.18 111.275,62.431 111.275,61.414 112.014,60.675 U15.10@112.725,60.675
G4.2.E: Q40.2 R55.2 U16.12 | length 32.8
  Signal Layer 1 w0.25: v1(89.5,64.6) 92.025,67.125 99.086,67.125 99.775,67.814 100.551,68.59 104.488,68.59 105.103,67.975 v2(105.85,67.975)
  Bottom Layer w0.25: v1(89.5,64.6) 88.7,64.6 88.125,65.175 88.125,65.661 88.195,65.731 88.195,66.306 88.425,66.536 88.425,66.55 88.925,67.05 U16.12@89.6,67.05 ; v2(105.85,67.975) 106.05,67.975 106.425,68.35 Q40.2@107.375,68.35 109.6,68.35 110.025,68.775 R55.2@115.6,68.775
G4.2.F: Q39.2 R54.2 U16.6 | length 58.3
  Top Layer w0.25: v2(87.179,66.203) 89.287,66.203 89.715,65.775 91.585,65.775 92.485,66.675 92.606,66.553 v2(99.23,66.553)
  Signal Layer 2 w0.25: v1(114.325,71.7) 115.091,71.7 115.691,72.3 116.209,72.3 116.809,71.7 118.501,71.7 119.051,72.25 121.599,72.25 122.249,72.9 v1(123.4,72.9)
  Signal Layer 1 w0.25: v2(99.23,66.553) 99.528,66.553 99.65,66.675 100.385,65.94 101.649,65.94 101.849,66.14 107.24,66.14 110.55,69.45 112.075,69.45 v1(114.325,71.7)
  Bottom Layer w0.25: U16.6@83.8,69 85.975,69 87.25,67.725 87.179,67.654 v2(87.179,66.203) ; Q39.2@121.2,69.625 121.85,69.625 123.4,71.175 v1(123.4,72.9)
  Bottom Layer w0.4: R54.2@115,73.225 117.6,73.225 Q39.2@121.2,69.625
G4.3.E.1: Q43.2 Q44.2 R52.2 R53.2 U16.4 | length 47.8
  Signal Layer 1 w0.25: v2(79.525,65.05) 86.325,71.85 92.575,71.85 93.25,72.525 v2(93.25,72.85)
  Bottom Layer w0.25: v2(79.525,65.05) 82.175,67.7 U16.4@83.8,67.7 ; v2(93.25,72.85) 93.25,74 94.225,74.975 Q44.2@94.8,74.975 99.3,74.975 99.3,74.35 100.025,73.625 v2(105.175,73.625) 105.175,74 105.475,74.3 Q43.2@105.475,75 113,75 113.65,75.65 R52.2@113.65,76.575
G4.3.F.2: Q41.2 Q42.2 R50.2 R51.2 U16.2 | length 51.8
  Top Layer w0.25: v2(96.25,67.825) 97.972,67.825 98.547,68.4 100.361,68.4 100.611,68.65 101.7,68.65 102.4,67.95 v2(104.35,67.95)
  Signal Layer 1 w0.2: v2(74.675,66.725) 74.7,66.7 74.7,65.576 76.051,64.225 81.15,64.225 81.725,64.8 v2(81.725,65.325)
  Signal Layer 1 w0.25: v2(81.725,65.325) 84.625,68.225 86.059,68.225 86.459,67.825 v2(96.25,67.825)
  Bottom Layer w0.25: Q42.2@74.575,67.85 74.575,68.2 73.75,69.025 73.75,70.15 74.225,70.625 78.65,70.625 79.275,70 R51.2@79.275,69.5 ; v2(81.725,65.325) 81.964,65.325 83.039,66.4 U16.2@83.8,66.4 ; Q41.2@94.8,67.825 v2(96.25,67.825) ; R50.2@102.875,70.275 103.65,70.275 103.875,70.05 103.875,68.425 v2(104.35,67.95)
  Bottom Layer w0.4: Q42.2@74.575,67.85 74.575,66.825 v2(74.675,66.725)
G4.AB: Q45.2 R56.2 U16.10 | length 20.4
  Signal Layer 2 w0.2: v2@85.55,73.55 85.7,73.7 87.274,73.7 89.149,71.825 90.525,71.825 v2(91.35,72.65)
  Bottom Layer w0.25: v2(85.425,73.675) 84.675,74.425 Q45.2@84.675,74.975 85.325,74.975 85.6,75.25 87.75,75.25 88.65,76.15 88.65,76.475 89.1,76.925 R56.2@90.025,76.925 ; U16.10@89.6,68.35 90.311,68.35 91.35,69.389 v2(91.35,72.65)
G4.AD: Q46.2 R57.2 U16.8 | length 26.3
  Signal Layer 2 w0.25: v2(76.675,72.5) 77.516,72.5 78.066,71.95 85.084,71.95 85.479,72.345 85.479,72.563 85.741,72.825 87.3,72.825 v2(87.65,72.475)
  Bottom Layer w0.25: v2(76.675,72.5) 76.515,72.5 76.475,72.54 76.475,72.628 76.153,72.95 76.065,72.95 75.875,73.14 75.875,74.091 75.488,74.479 75.146,74.479 Q46.2@74.65,74.975 77.8,74.975 78.425,75.6 78.425,76.35 79,76.925 R57.2@79.925,76.925 ; v2(87.65,72.475) 87.65,70.55 88.55,69.65 U16.8@89.6,69.65
G5.1.E: Q48.2 R59.2 U17.4 | length 12.6
  Bottom Layer w0.25: R59.2@62.05,70.525 62.05,72.925 Q48.2@63.925,74.8 ; Q48.2@63.925,75 64.75,75 65.25,75.5 65.25,77.575 65.65,77.975 67.625,77.975 67.925,77.675 U17.4@67.925,76.7
G5.1.F: Q47.2 R58.2 U17.2 | length 26
  Top Layer w0.25: v1(54.35,68.025) 57.1,65.275 v1(57.1,65.25)
  Signal Layer 1 w0.25: v1(54.35,68.025) 61.802,68.025 65.653,71.876 65.653,72.219 66.303,72.869 66.303,72.987 67.178,73.862 v2(67.178,73.979)
  Bottom Layer w0.25: v1(54.35,68.025) 54.35,68.3 54.7,68.65 Q47.2@54.7,69.375 ; R58.2@55.225,64.9 56.75,64.9 v1(57.1,65.25) ; U17.2@66.625,76.7 66.625,74.532 v2(67.178,73.979)
G5.2.E: Q50.2 R61.2 U17.12 | length 37.7
  Signal Layer 1 w0.25: v1(50.1,73.95) 50.1,72.55 53.725,68.925 53.725,67.766 54.091,67.4 54.9,67.4 55.075,67.575 61.989,67.575 66.103,71.689 66.103,72.033 66.174,72.104 67.187,72.104 67.553,72.47 67.553,72.862 67.895,73.205 67.896,73.204 68.562,73.204 68.812,72.954 v2(69.278,72.954)
  Bottom Layer w0.25: Q50.2@45.175,75 47.6,75 ; R61.2@49.95,75.6 48.2,75.6 47.6,75 ; v1(50.1,73.95) 49.05,75 47.6,75 ; U17.12@67.275,70.9 67.35,70.9 67.25,71 67.25,71.495 67.61,71.855 68.339,71.855 69.278,72.795 v2(69.278,72.954)
G5.2.F: Q49.2 R60.2 U17.6 | length 30.4
  Signal Layer 2 w0.25: v2(54.95,72.75) 54.95,73.225 56.559,74.834 58.37,74.834 58.761,75.225 64.149,75.225 64.499,75.575 66.233,75.575 66.683,75.125 67.446,75.125 68.096,74.475 68.559,74.475 68.6,74.516 69.184,74.516 70.203,73.497 v2(70.203,73.154)
  Bottom Layer w0.25: v2(54.95,72.75) 54.275,73.425 Q49.2@54.275,75.025 57.05,75.025 58.125,76.1 58.125,76.325 58.75,76.95 R60.2@59.3,76.95 ; U17.6@69.225,76.7 69.225,74.125 70.196,73.154 v2(70.203,73.154)
G5.3.E: Q52.2 R63.2 U17.8 | length 54
  Signal Layer 1 w0.25: v1(33.625,72.2) 34.35,72.925 48.984,72.925 53.275,68.634 53.275,67.58 53.905,66.95 62.67,66.95 67.796,72.076 67.919,71.954 70.904,71.954 v2(71.45,72.5)
  Bottom Layer w0.25: R63.2@31.65,68.15 31.65,71.325 32.525,72.2 v1(33.625,72.2) 34.375,72.2 34.875,71.7 Q52.2@34.875,71.225 ; U17.8@69.875,70.9 69.875,72.075 69.954,72.154 70.618,72.154 70.964,72.5 v2(71.45,72.5)
G5.3.F: Q51.2 R62.2 U17.10 | length 55.8
  Signal Layer 1 w0.25: v1(38.65,69.025) 50.716,69.025 53.241,66.5 62.856,66.5 65.381,69.025 70.107,69.025 73.857,72.775 v2(73.75,72.775)
  Bottom Layer w0.25: v1(38.65,69.025) 39.65,69.025 40.025,69.4 Q51.2@41.525,69.4 41.525,70.1 41.25,70.375 40.975,70.375 40.575,70.775 40.575,71.7 40.825,71.95 42.625,71.95 R62.2@43.625,70.95 ; U17.10@68.575,70.9 68.575,70.225 69.025,69.775 70.02,69.775 70.47,70.225 71.409,70.225 73.109,71.925 73.125,71.925 73.75,72.55 v2(73.75,72.775)
G5.AB: Q53.2 R64.2 U4.10 | length 26.4
  Top Layer w0.25: Q53.2@91.55,32.475 91.55,30.275 92.025,29.8 92.025,28.51 91.925,28.41 91.925,27.49 92.89,26.525 93.175,26.525 v2(93.2,26.55) ; U4.10@101.325,29.025 103.625,29.025 v1(106.225,26.425)
  Signal Layer 1 w0.25: v2(93.2,26.55) 93.225,26.525 94.025,26.525 94.6,25.95 105.75,25.95 v1(106.225,26.425)
G5.AD: Q54.2 R65.2 U4.8 | length 15.7
  Top Layer w0.25: v2(89.075,26.6) 89.9,26.6 Q54.2@90.35,27.05 90.35,26.325 90.975,25.7 98.35,25.7 100.375,27.725 U4.8@101.325,27.725
  Bottom Layer w0.25: v2(89.075,26.6) 89.85,26.6 R65.2@90.325,27.075